# Altium PCB B45100557C.PCBDOC
Units mil, origin at the board's own origin, x right, y up, seen from the top; angles counter-clockwise.
Board outline 6000 x 4000 mil, 4 copper layers (Top Layer, L2, L3, Bottom Layer); 99 components, 46 nets, 282 pads, 307 vias.
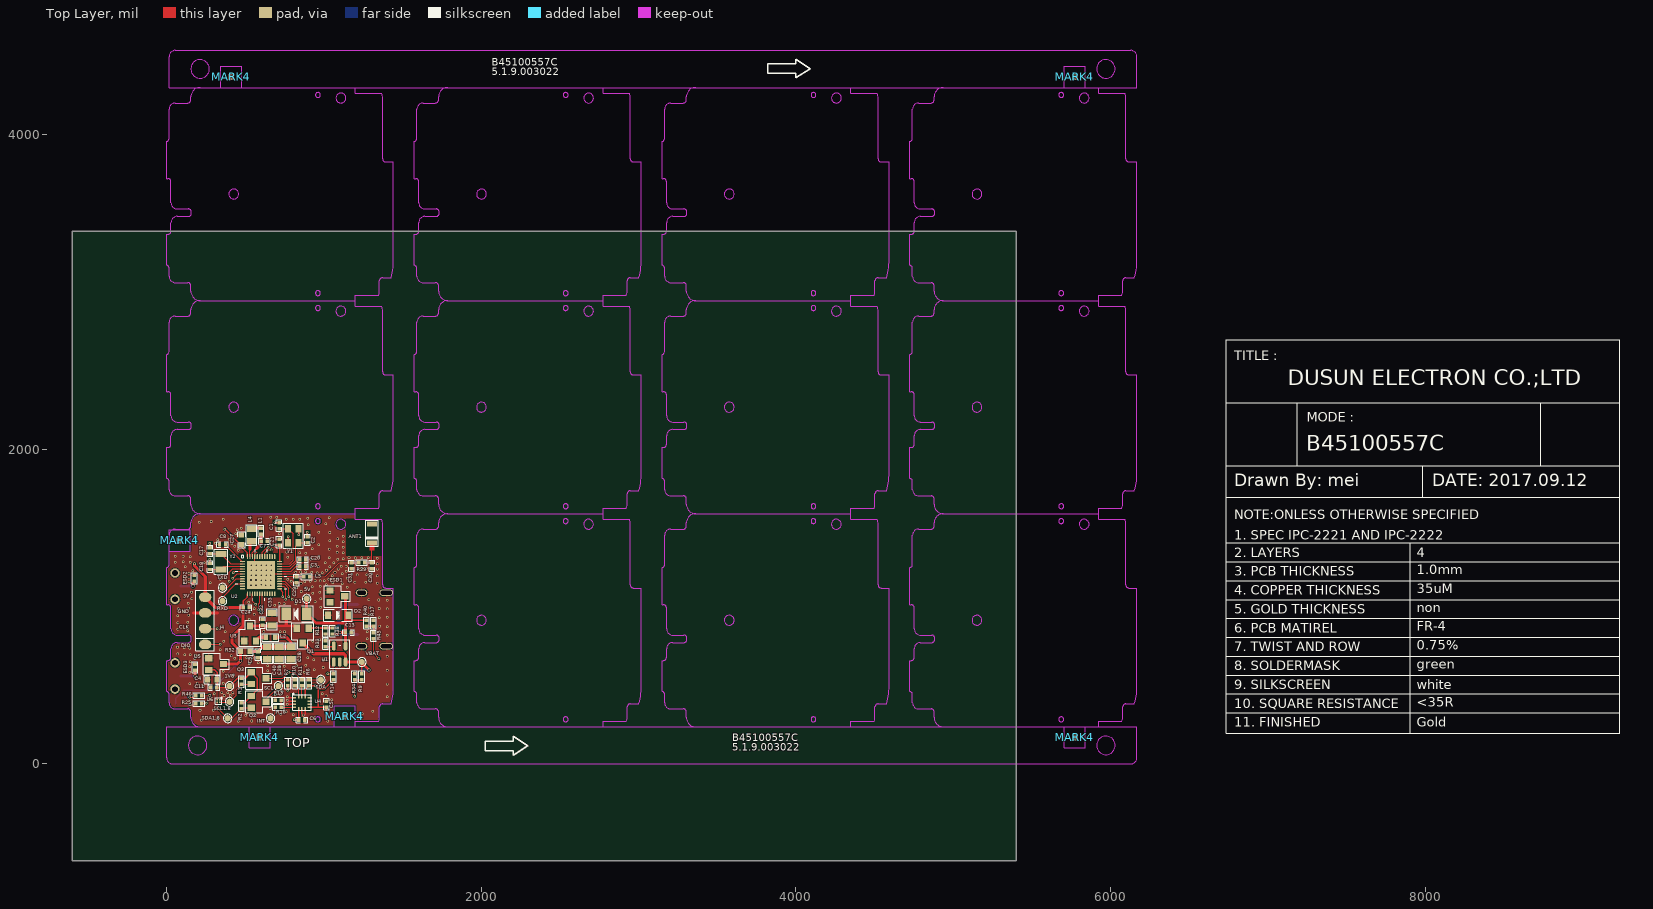
[diagram p0: Top Layer view]
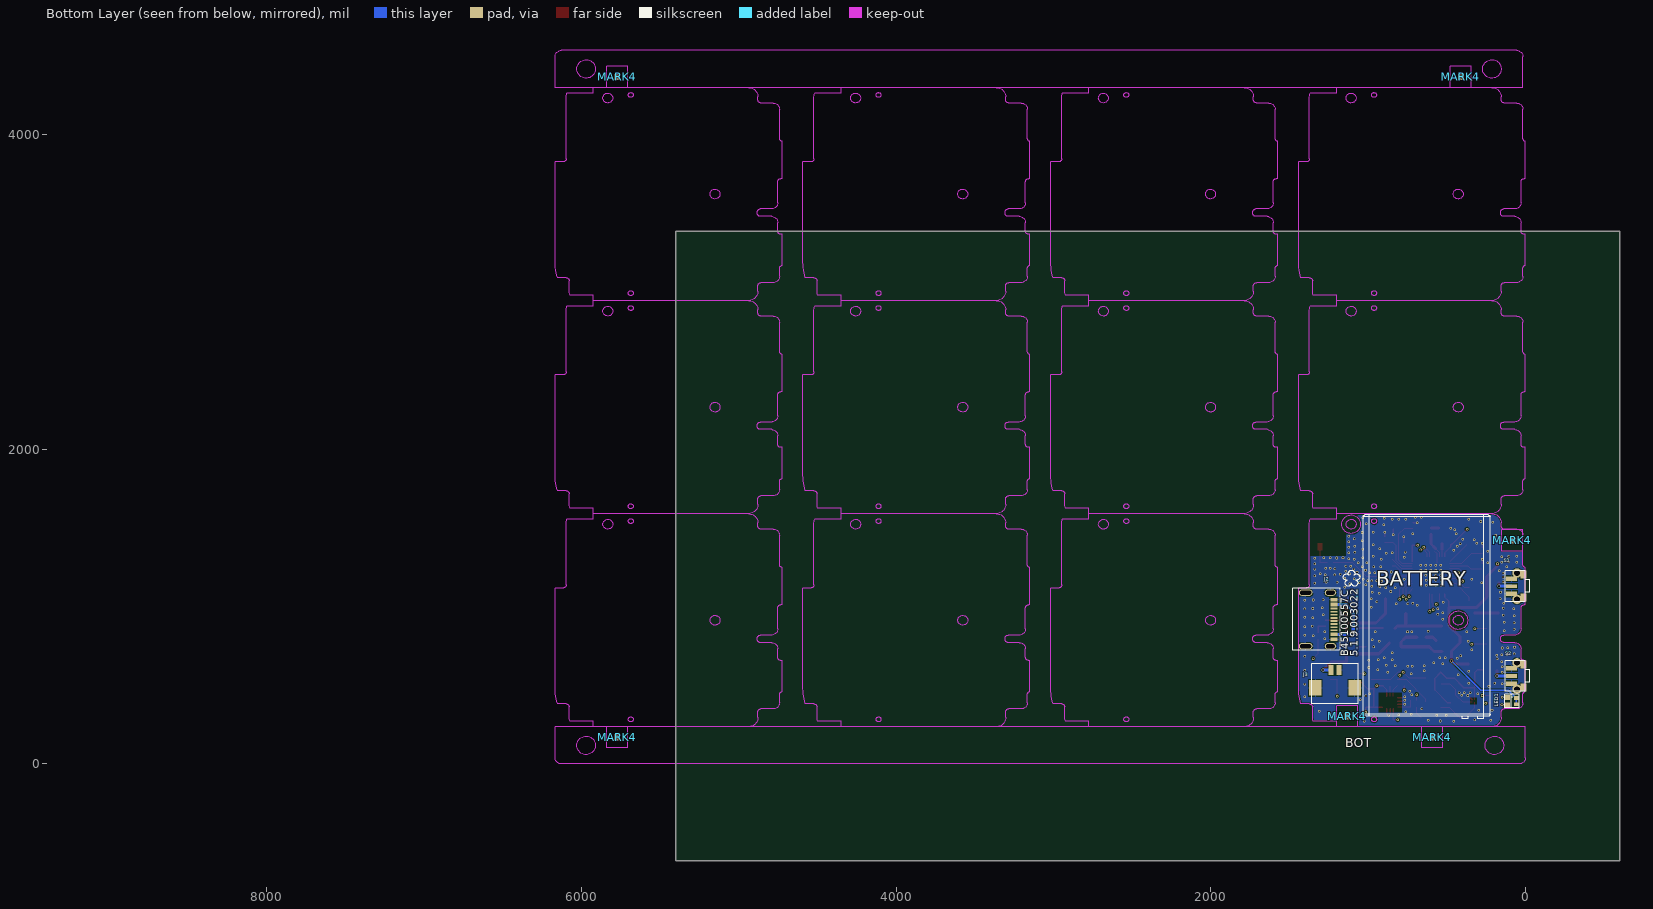
[diagram p1: Bottom Layer view, seen from below]
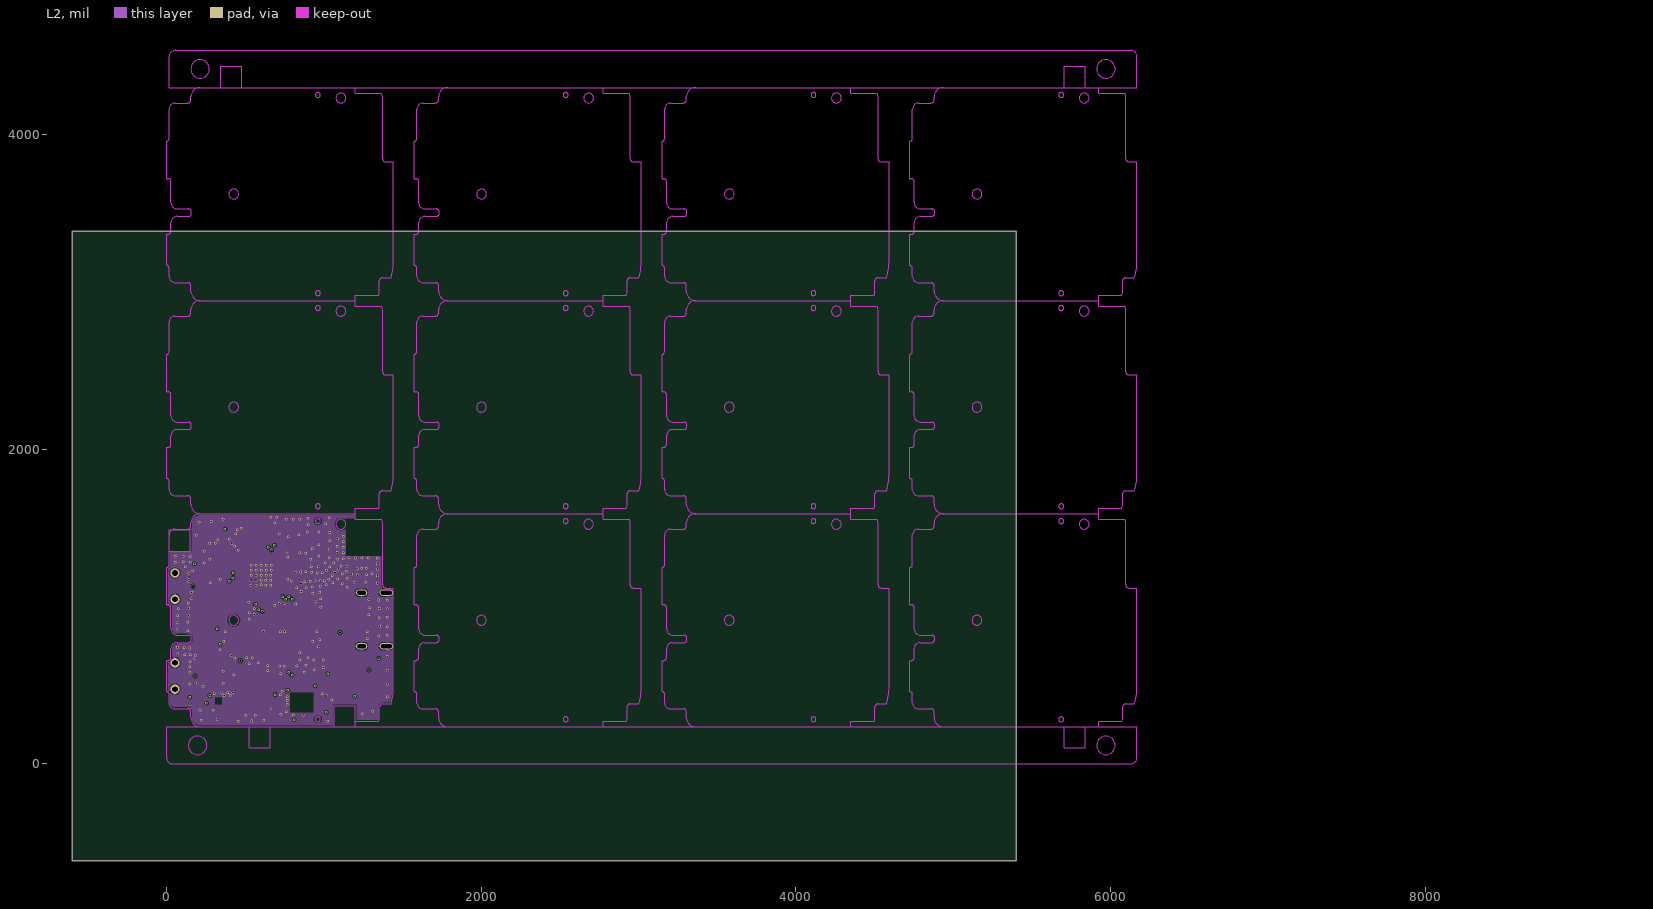
[diagram p2: L2]
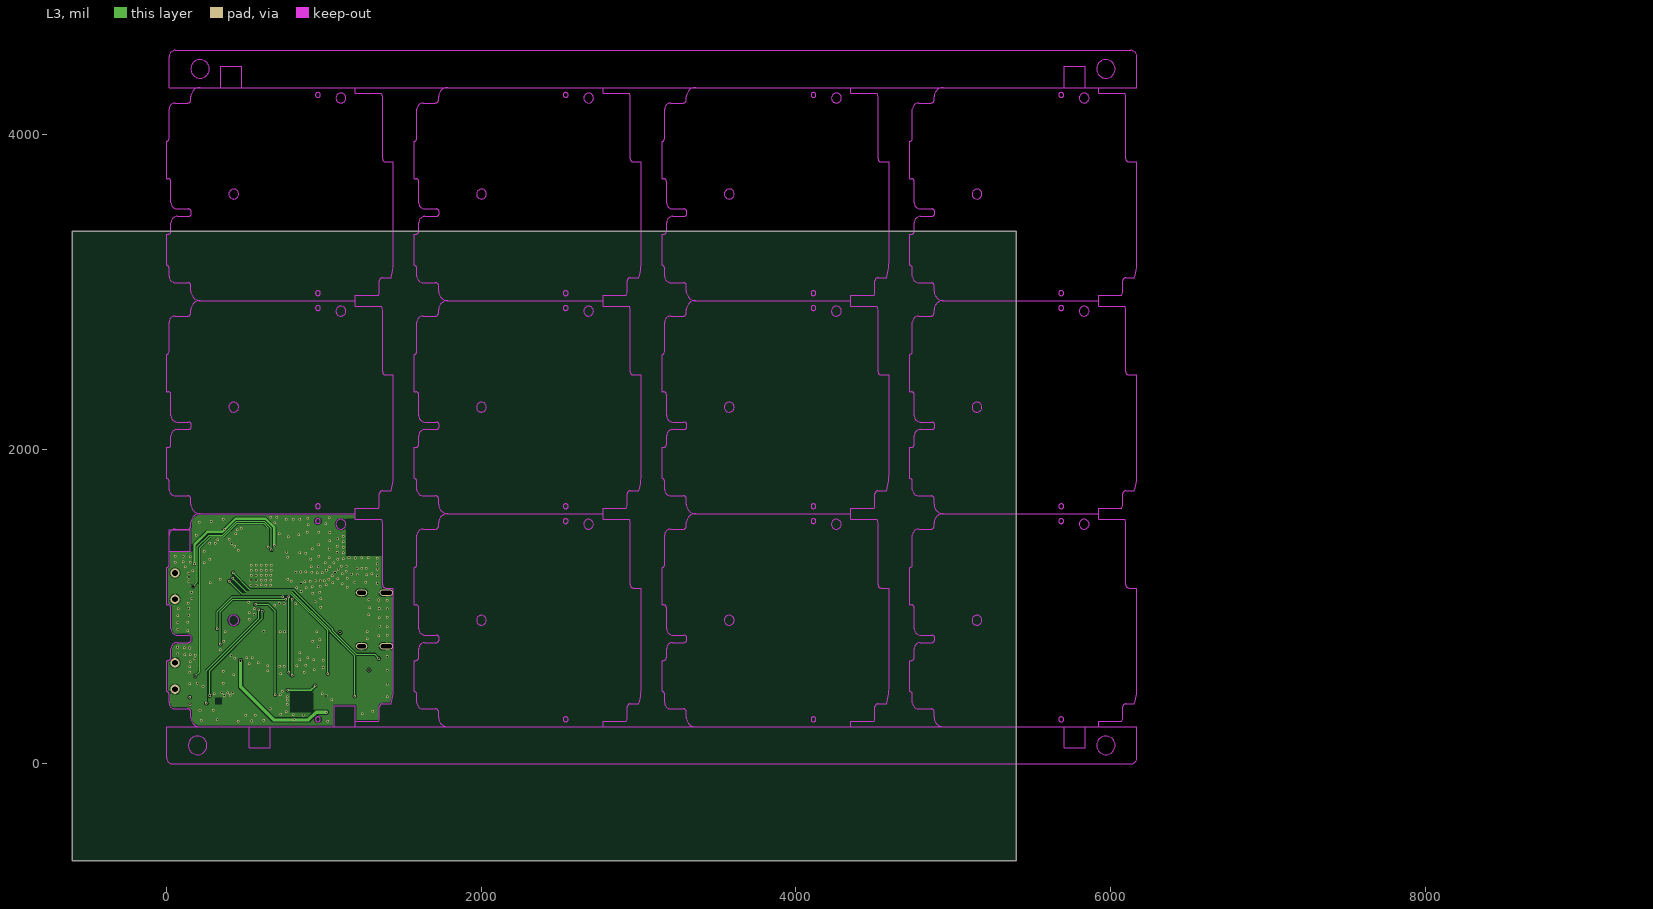
[diagram p3: L3]

## Layer stack, top to bottom
Top Layer: signal copper 1.4
Dielectric: core 12.6, FR-4, Dk 4.8
L2: signal copper 1.417
Dielectric: prepreg 12.6, FR-4, Dk 4.8
L3: signal copper 1.417
Dielectric: core 12.6, FR-4, Dk 4.8
Bottom Layer: signal copper 1.4

## Board outline
-599.3,-613.99 5400.7,-613.99 5400.7,3386.01 -599.3,3386.01

## Design rules (kind name [scope] priority, off if disabled: settings)
Clearance [All] p1: gap=6
ComponentClearance [All] p1: gap=0 collisioncheckmode=3 verticalgap=0
PolygonConnect PolygonConnect_1 [(InPadClass('All Pads'))] p1: connectstyle=Relief reliefconductorwidth=10 reliefentries=4 polygonreliefangle="90 Angle"
PolygonConnect [All] p2: connectstyle=Direct reliefconductorwidth=10 reliefentries=4 polygonreliefangle="90 Angle"
RoutingVias [All] p1: holewidth=28 width=50 viastyle="Through Hole" minholewidth=28 minwidth=50 maxholewidth=28 maxwidth=50
SolderMaskExpansion [All] p1: expansion=4
TestPointUsage [All] p1: valid=0 allowmultiple=FALSE
Testpoint [All] p1: side=15 testpointundercomponent=TRUE minsize=40 maxsize=100 preferedsize=60 minholesize=0 maxholesize=40 preferedholesize=32 testpointgrid=1 style=1023 order=0123456789
Width [All] p1: maxlimit=100 minlimit=5.91 preferedwidth=6 toplayer_prefwidth=5.98 bottomlayer_prefwidth=5.98 minimp=50.000000 maximp=50.000000 favimp=50.000000
18 further rules are at their usual default settings.

## Classes and differential pairs
component class B45100557C: 1V8 5V ANT1 ANT? C1 C2 C3 C4 C5 C6 C7 C8 C9 C11 C13 C17 C18 C20 C21 C24 C27 C28 C29 C30 C31 C32 C33 C39 C40 C? D1 D2 ESD1 ESD2 ESD3 INT J2 J3 J4 J? L1 L2 L4 L5 L? LED1 LED? Q1 Q2 Q3 Q? R1 R2 R6 R7 R9 R10 R11 R12 R13 R14 R16 R17 R25 R29 R33 R34 R38 R40 R45 R46 R52 R? RXD S1 S2 SCL SCL1.8 SDA SDA1.8 TXD U1 U2 U3 U4 U5 U6 U? VBAT VOL+ VOL- Y1 Y2 Y?

## Components (designator, comment, footprint, x,y, rotation, side; value= is the part's Value field where it differs from the comment)
1V8 "TAP" TS-1.0 400,495 r90 top
5V "TAP" TS-1.0 890,1050 r0 top
ANT1 "RFANT3216120A5T" RFANT3216120A1T 1305,1465 r90 top
C1 "20pF" C-0402 715,1515 r90 top
C2 "20pF" C-0402 895,1425 r90 top
C3 "NC" C-0402 865,1255 r0 top
C4 "10uF" C-0603 290,535 r180 top
C5 "0.1uF" C-0402 1015,380 r90 top
C6 "0.1uF" C-0402 860,280 r0 top
C7 "1uF" C-0402 620,1415 r180 top
C8 "0.1uF" C-0402 355,1395 r0 top
C9 "0.1uF" C-0402 580,695 r270 top
C11 "0.1uF" C-0402 300,485 r180 top
C13 "1uF/10V" C-0402 1155,835 r0 top
C17 "12pF" C-0402 275,1355 r90 top
C18 "12pF" C-0402 275,1255 r90 top
C20 "100pF" C-0402 865,1300 r0 top
C21 "0.1uF" C-0402 715,1410 r90 top
C24 "0.1uF" C-0402 505,995 r0 top
C27 "4.7uF" C-0603 475,1425 r90 top
C28 "22uF" C-0805 790,705 r270 top
C29 "0.8pF" C-0402 825,1170 r270 top
C30 "NC" C-0402 1305,1260 r270 top
C31 "NC" C-0402 1175,1260 r270 top
C32 "0.1uF" C-0402 610,900 r90 top
C33 "22uF" C-0805 670,920 r90 top
C39 "22uF" C-0805 715,705 r270 top
C40 "22uF" C-0805 640,705 r270 top
D1 "BAS85" SOD-80 825,955 r180 top
D2 "MMSZ5232B" sod-123 1090,945 r0 top
ESD1 "ESD dual" SOT-23 1085,1065 r0 top
ESD2 "PESD5V0X1BCAL" R-0402 175,1180 r270 top
ESD3 "PESD5V0X1BCAL" R-0402 180,615 r270 top
INT "TAP" TS-1.0 660,290 r270 top
J2 "USB type C" "USB TYPE C" 1216.81,918.31 r270 bottom locked
J3 "HEADER-2" 1.25T-2AWB 1210,540 r180 bottom
J4 "HEADER-4" PH-4-2.54-1 245,910 r90 top
L1 "15nH" R-0402 600,1480 r270 top
L2 "BLM18AG601SN1D" R-0603 660,805 r180 top
L4 "10uH" R-0805 540,1455 r90 top
L5 "3.9nH" R-0402 890,1190 r0 top
LED1 "LED*2-4" A-SP1942R6B1C-A01-2T 85,400 r180 bottom locked
MARK4 "MARK" MARK-3.0#1 5772.51,169.29 r90 top
MARK4 "MARK" MARK-3.0#1 590.55,169.29 r90 top
MARK4 "MARK" MARK-3.0#1 5772.52,4366.18 r270 top
MARK4 "MARK" MARK-3.0#1 409.45,4366.16 r270 top
MARK4 "MARK" MARK-3.0#1 1132.75,303.17 r90 top
MARK4 "MARK" MARK-3.0#1 82.53,1420.28 r90 top
MARK4 "MARK" MARK-3.0#2 590.55,169.29 r180 bottom
MARK4 "MARK" MARK-3.0#2 5772.51,169.29 r0 bottom
MARK4 "MARK" MARK-3.0#2 409.45,4366.16 r180 bottom
MARK4 "MARK" MARK-3.0#2 5772.52,4366.18 r0 bottom
MARK4 "MARK" MARK-3.0#2 1132.75,303.17 r0 bottom
MARK4 "MARK" MARK-3.0#2 82.53,1420.28 r0 bottom
Q1 "DMP2305U" SOT-23 865,815 r270 top
Q2 "SI2312" SOT-23 585,395 r0 top
Q3 "SI2312" SOT-23 585,545 r0 top
R1 "2.2k" R-0402 475,525 r270 top
R2 "2.2k" R-0402 475,370 r270 top
R6 "4.7k" R-0402 905,515 r90 top
R7 "4.7k" R-0402 770,515 r90 top
R9 "1M,1%,0402" R-0402 1240,555 r90 top
R10 "10R" R-0402 815,515 r90 top
R11 "10R" R-0402 860,515 r90 top
R12 "1M" R-0402 1010,845 r90 top
R13 "0R" R-0402 710,405 r0 top
R14 "10k" R-0402 1060,555 r90 top
R16 "10R" R-0402 710,360 r0 top
R17 "300k" R-0402 1315,895 r270 top
R25 "220R" R-0402 205,385 r180 top
R29 "NC" R-0402 1240,1280 r0 top
R33 "8.2K" R-0402 1010,765 r270 top
R34 "1M,1%,0402" R-0402 1195,555 r270 top
R38 "10K" R-0402 1055,845 r270 top
R40 "200k" R-0402 1270,895 r90 top
R45 "10R" R-0402 1315,815 r90 top
R46 "1k" R-0402 205,435 r180 top
R52 "0R" R-0603 500,715 r0 top
RXD "TAP" TS-1.0 355,1035 r90 top
S1 "SKRTLAE010" SKRTLAE010 88.58,1129.96 r90 bottom locked
S2 "SKRTLAE010" SKRTLAE010 88.58,559.06 r90 bottom locked
SCL "TAP" TS-1.0 710,495 r0 top
SCL1.8 "TAP" TS-1.0 400,395 r90 top
SDA "TAP" TS-1.0 980,535 r0 top
SDA1.8 "TAP" TS-1.0 388,290 r90 top
TXD "TAP" TS-1.0 355,1120 r270 top
U1 "CE3150AM" SOT-23-5 1100,720 r0 top
U2 "nRF52832" QFN-48-6*6-0.4 600,1200 r270 top locked
U3 "S-1206B30-M3T1G(S)" SOT-23 530,830 r90 top
U4 "LSM6DSL" LGA14 860,390 r0 top
U5 "S-1206B18-M3T1S" SOT-23 315,635 r0 top
U6 "AK09918C" AK09918C 330,400 r90 top
VBAT "TAP" TS-1.0 1240,647.83 r90 top
Y1 "32Mhz,12pF" XD3225-1-12M-125M 805,1450 r270 top
Y2 "32.768KHz,12.5pF" 32.768Khz-3215 345,1285 r270 top
? "Comment" 1-ARROW 3820,4420 r0 top
? "Comment" 1-ARROW 2025,115 r0 top
? "Comment" "PCB technical" 6735,2695 r0 top
? "Comment" 梅花 1105,1150 r180 bottom

## Footprints (in the part's own frame and the unit in brackets; to place one, negate y for a bottom-side part, rotate by r counter-clockwise, add the part's x,y. Pads: shape width x height; smd on the part's side, far side on the other; paste and mask are expansions set on the pad)
1-ARROW [mil]
  silkscreen extent 0,-60 270,60
1.25T-2AWB [mm]
  rect 2x2.5 smd: 0(-3.175,-1.45) 0(3.175,-1.45)
  rect 0.8x1.6 smd: 1(0.625,1.45) 2(-0.625,1.45)
  silkscreen extent -3.75,-4 3.75,2.5
32.768Khz-3215 [mm]
  rect 1x1.8 smd: 1(-1.25,0) 2(1.25,0)
  silkscreen extent -2,-1.1 2,1.1
A-SP1942R6B1C-A01-2T [mm]
  rect 0.8x0.8 smd: 1(-0.7,-0.6) 2(-0.7,0.6)
  rect 0.8x0.6 smd: 3(0.7,0.5) 4(0.7,-0.5)
  silkscreen extent -1.2,-1.1 1.2,1.1
AK09918C [mm]
  round 0.23 smd: A1(0.2,-0.2) A2(-0.2,-0.2) B1(0.2,0.2) B2(-0.2,0.2)
  silkscreen extent -0.5,-0.63 0.63,0.5
C-0402 [mil]
  rect 22x24 smd: 1(-19,0) 2(19,0)
  silkscreen extent -36,-18 36,18
C-0603 [mil]
  rect 30x35 smd: 1(-30,0) 2(30,0)
  silkscreen extent -51,-24 51,24
C-0805 [mil]
  rect 40x56 smd: 1(-40,0) 2(40,0)
  silkscreen extent -66,-34 66,34
LGA14 [mm]
  rect 0.675x0.25 smd: 1(-1.263,0.75) 2(-1.263,0.25) 3(-1.263,-0.25) 4(-1.263,-0.75) 8(1.263,-0.75) 9(1.263,-0.25) 10(1.263,0.25) 11(1.263,0.75)
  rect 0.25x0.675 smd: 5(-0.5,-1.013) 6(0,-1.013) 7(0.5,-1.013) 12(0.5,1.013) 13(0,1.013) 14(-0.5,1.013)
  silkscreen extent -1.5,-1.25 1.5,1.47
MARK-3.0#1 [mm]
  rect 1x1 smd: 1(0,0)
  rect 2.5x2.5 on Top Solder: 4(0,0)
  Keep-Out Layer lines w0.127: -1.7,1.7 1.7,1.7 1.7,-1.7 -1.7,-1.7 -1.7,1.7
MARK-3.0#2 [mm]
  rect 1x1 smd: 1(0,0)
  rect 2.5x2.5 on Bottom Solder: 4(0,0)
  Keep-Out Layer lines w0.127: 1.7,-1.7 1.7,1.7 -1.7,1.7 -1.7,-1.7 1.7,-1.7
"PCB technical" [mil]
  silkscreen extent 0,-2500 2500,0
PH-4-2.54-1 [mil]
  oval 60x78.74 smd: 1(-150,0) 2(-50,0) 3(50,0) 4(150,0)
  silkscreen extent -189,-59 194,59
QFN-48-6*6-0.4 [mm]
  rect 4.5x4.5 smd: 0(0,0)
  oval 0.2x0.8 smd: 1(-2.2,-3) 2(-1.8,-3) 3(-1.4,-3) 4(-1,-3) 5(-0.6,-3) 6(-0.2,-3) 7(0.2,-3) 8(0.6,-3) 9(1,-3) 10(1.4,-3) 11(1.8,-3) 12(2.2,-3) 25(2.2,3) 26(1.8,3) 27(1.4,3) 28(1,3) 29(0.6,3) 30(0.2,3) 31(-0.2,3) 32(-0.6,3) 33(-1,3) 34(-1.4,3) 35(-1.8,3) 36(-2.2,3)
  oval 0.8x0.2 smd: 13(3,-2.2) 14(3,-1.8) 15(3,-1.4) 16(3,-1) 17(3,-0.6) 18(3,-0.2) 19(3,0.2) 20(3,0.6) 21(3,1) 22(3,1.4) 23(3,1.8) 24(3,2.2) 37(-3,2.2) 38(-3,1.8) 39(-3,1.4) 40(-3,1) 41(-3,0.6) 42(-3,0.2) 43(-3,-0.2) 44(-3,-0.6) 45(-3,-1) 46(-3,-1.4) 47(-3,-1.8) 48(-3,-2.2)
  silkscreen extent -4.19,-4.19 4.19,4.19
R-0402 [mil]
  rect 22x24 smd: 1(-19,0) 2(19,0)
  silkscreen extent -36,-18 36,18
R-0603 [mil]
  rect 30x35 smd: 1(-30,0) 2(30,0)
  silkscreen extent -51,-24 51,24
R-0805 [mil]
  rect 40x56 smd: 1(-40,0) 2(40,0)
  silkscreen extent -66,-34 66,34
RFANT3216120A1T [mm]
  rect 0.8x1.66 smd: 1(-1.55,0) 2(1.55,0)
  Top Layer region: -2.78,-0.4 -1.55,-0.4 -1.55,0.406 -2.78,0.406
  Top Layer pour cut-out: -3.66,-1.74 -3.66,4.26 2.34,4.26 2.34,-1.74
  Bottom Layer pour cut-out: -3.66,-1.74 -3.66,4.26 2.34,4.26 2.34,-1.74
  silkscreen extent -2.1,-1 2.1,1
SKRTLAE010 [mm]
  rect 1.3x0.9 smd: 0(-1.85,-1.95) 0(1.85,-1.95)
  rect 0.75x1.8 smd: 1(-1.225,0) 1(1.225,0)
  rect 0.6x1.8 smd: 2(0,0)
  silkscreen extent -2.5,-2.95 2.5,1
SOD-80 [mil]
  rect 60x78.74 smd: 1(-65,0) 2(65,0)
  silkscreen extent -108,-50 108,50
sod-123 [mm]
  rect 0.91x1.22 smd: 1(-1.635,0) 2(1.635,0)
  silkscreen extent -2.3,-1 2.3,1
SOT-23 [mil]
  rect 45x40 smd: 1(-47.24,37.4) 2(-47.24,-37.4) 3(47.24,0)
  silkscreen extent -83,-69 83,69
SOT-23-5 [mm]
  oval 0.6x1.5 smd: 1(-0.95,-1.833) 2(0,-1.833) 3(0.95,-1.833) 4(0.95,0.767) 5(-0.95,0.767)
  silkscreen extent -1.6,-2.83 1.6,1.77
TS-1.0 [mm]
  round 1 smd: 1(0,0)
  silkscreen extent -0.7,-0.7 0.7,0.7
"USB TYPE C" [mm]
  oval 1x2.2 hole 0.6 slot 1.8 at 90 deg: 0(-4.32,-4.565) 0(4.32,-4.565)
  oval 1x1.8 hole 0.6 slot 1.4 at 90 deg: 0(-4.32,-0.565) 0(4.32,-0.565)
  rect 0.6x1.15 smd: A1/B12(-3.2,0) A4/B9(-2.4,0) B1/A12(3.2,0) B4/A9(2.4,0)
  rect 0.3x1.15 smd: A5(-1.25,0) A6(-0.25,0) A7(0.25,0) A8(1.25,0) B5(1.75,0) B6(0.75,0) B7(-0.75,0) B8(-1.75,0)
  silkscreen extent -5,-6.67 5,1
XD3225-1-12M-125M [mm]
  rect 1.2x1 smd: 1(-1.15,-0.85) 2(1.15,0.85) 3(-1.15,0.85) 3(1.15,-0.85)
  silkscreen extent -2.04,-1.6 2.02,1.6
梅花 [mil]
  silkscreen extent -52,-20 52,82

## Part data
ANT1: library part ANTENNA
C1 C2 C3 C4 C7 C8 C20 C21 C24 C27 C29 C30 C31 C32 C33 C39 C40: library part CAP
C5 C6 C11: library part Cap, "capacitor 27 pF NPO , +/- 2 %, SMD case 0603"
C9 C13: library part "CAP E"
C17 C18: library part CAP, "Capacitor"
C28: library part "CAPACITOR POL"
D1: library part DIODE
D2: library part ZENER
ESD2 ESD3: library part ESD
J2: library part HEADER-6
J3: library part HEADER-16
L1 L2: library part Inductance
L4 L5: library part INDUCTOR
LED1: library part LED
Q1: library part NPN, "NPN型晶体管"
Q2 Q3: library part "MOSFET N"
R1 R2 R6 R7 R9 R10 R11 R12 R13 R14 R16 R17 R25 R29 R33 R34 R38 R40 R45 R46 R52: library part RES
S1 S2: library part SW-PB
U2: library part "BCM20735 60PIN QFN"
U3 U5: library part S-1206BXX
U4: library part BMI160
Y1: library part CRYSTAL4
Y2: library part CRYSTAL2

## Free pads (board coordinates)
  round 59.06 hole 35.43: 3(53.15,475.39) 3(53.15,642.72) 3(53.15,1046.3) 3(53.15,1213.62)

## Via types
v1: diameter 16, hole 10, Top Layer to Bottom Layer, tented both sides, 302 vias
v2: diameter 20, hole 14, Top Layer to Bottom Layer, tented both sides, 5 vias

## Nets (pads, with @x,y where several pads share a name; then routed paths per layer and width w, separated by ;. In a path a pad name is that pad's centre, name@x,y a point inside that pad or via, vN(x,y) a via of type N, cw(c..) or ccw(c..) an arc to the next point about the centre after c; other vN are vias at no path point)
1V8: 1V8.1 C4.1 C11.1 Q2.1 Q3.1 R1.1 R2.1 U5.2 U6.B1 | length 751.9
  Top Layer w6: U6.B1 C11.1@322.13,481.87
  Top Layer w10: U5.2 305.4,597.6 322.13,580.87 C11.1@322.13,485 ; C11.1 392,485 451,544 499.35,544 Q3.1 575,545.16 575,469.65 494.35,389 R2.1
3V: C5.1 C6.1 C21.1 C24.1 C27.1 J4.4 LED1.3 LED1.4 R6.1 R7.1 R14.1 R52.1 U2.13 U2.36 U2.48 U4.5 U4.8 U4.12 U5.3 | length 4515.1
  Top Layer w10: v1(370.6,1491.9) 467.5,1395 C27.1 475,1379 513.39,1340.61 U2.48 ; C24.1 486,1034 513.39,1061.39 U2.13 ; v1(685,1391) C21.1 ; U2.36 C21.1@718.11,1391 ; v1(770,468) R7.1 ; v1(811,280) 840.31,280 U4.5 ; U4.12 879.69,470.68 R6.1 v1(944,496) 963,477 ; U4.8 C5.1@1014.47,360.47 ; 963,360.47 963,477 ; v1(1015,329) C5.1 ; R14.1 1001,477 963,477
  Top Layer w20: v1(177,1273) 177,1259 245,1191 J4.4 310,995 C24.1 486,879 415,808 415,770 R52.1 v2(470,656) 449,635 U5.3
  L3 w10: v1(770,468) 916,468 v1(944,496)
  L3 w15: v1(177,1273) 177,1394 258,1475 353.69,1475 437.69,1559 628,1559 685,1502 v1(685,1391)
  L3 w20: v2(470,656) 470,491 681,280 901,280 950,329 v1(1015,329)
  Bottom Layer w10: LED1.4 57.44,417.44 109,469 283,469 v2(470,656)
BLUE: R25.1 U2.18 | length 866.4
  Top Layer w6: R25.1 v1(253,385) ; v1(586,980) 586,1017 592.13,1023.13 U2.18
  L3 w6: v1(253,385) 253,592 586,925 v1(586,980)
CHG: R14.2 U1.1 U2.4 | length 1286.6
  Top Layer w6: v1(398,1161) 398,1217 420.37,1239.37 U2.4 ; v1(1023,574) R14.2 U1.1@1060,645.24
  L3 w6: v1(398,1161) 476,1083.01 789,1083.01 1023,849 v1(1023,574)
GND: C1.2 C2.2 C3.2 C4.2 C5.2 C6.2 C7.1 C8.1 C9.2 C11.2 C13.2 C17.2 C18.2 C20.2 C21.2 C24.2 C27.2 C28.2 C29.2 C30.2 C31.2 C32.2 C33.2 C39.2 C40.2 D2.1 ESD1.1 ESD2.1 ESD3.1 J2.0 J2.A1/B12 J2.B1/A12 J3.0 J3.1 J4.3 pad.3 R12.1 R17.1 R33.1 R34.1 S1.0 S1.1 S2.0 S2.1 U1.2 U2.0 U2.31 U2.45 U3.1 U4.1 U4.2 U4.3 U4.6 U4.7 U5.1 U6.A1 Y1.3 | length 708.6
  Top Layer w6: U2.0@560.63,1275.63 560.63,1334.63 576,1350 ; U2.0@674.87,1207.87 758,1207.87
  Top Layer w10: C18.2 v1(275,1301) ; C17.2 v1(275,1402) ; U6.A1 v1(365,435) ; v1(688,1534) C1.2 ; Y1.3@771.54,1404.72 v1(771.54,1444.54) ; 776.16,380.16 U4.3 ; 776.53,419.53 U4.1 ; 776.84,399.84 U4.2 ; v1(838.46,1455.54) Y1.3@838.46,1495.28 ; 860,320 U4.6 ; 879.69,316.69 U4.7 ; C2.2 v1(895,1472)
  Top Layer w20: 172,960 324,960
  other v1: 1025,271 456,272 542,273 616,277 219,278 323,281 502,310 562,310 868,311 806,312 724,316 1242,320 761,331 1311,335 295,341 212,342 657,350 766,380 766,404 1049,408 766,428 1401,428 1013,432 405,437 723,440 989,446 302,447 389,453 350,454 419,454 736,461 231,494 1401,508 146,511 196,513 361,513 426,568 725,574 875,582 148,584 361,589 643,592 1402,594 938,600 995,613 147,617 748,621 718,622 642,623 827,625 883,626 526,638 581,642 151,649 996,658 936,661 846,663 180,668 433,671 508,674 545,674 896,676 1402,683 412,687 182,692 149,693 114,695 70,699 845,708 340,725 148,737 113,739 69,741 965,746 364,781 929,781 972,790 1275,796 1349,815 1403,817 954,839 1275,839 372,841 721,841 749,841 616,842 134,847 72,855 1403,873 1353,875 72,897 135,901 524,921 1350,930 1401,932 70,942 139,944 1285,947 556,950 524,960 1401,985 73,987 556,987 1352,988 139,989 1290,992 980,995 686,1010 746,1018 820,1019 715,1020 138,1021 522,1027 943,1032 1401,1041 1348,1042 1286,1043 979,1049 161,1051 928,1086 158,1090 974,1091 856,1096 826,1119 887,1121 1149,1123 926,1127 975,1130 631,1136 663,1136 536,1137 568,1137 600,1138 1015,1139 1116,1146 854,1147 1340,1149 1055,1151 278,1153 1197,1154 1266,1155 142,1158 877,1159 914,1160 792,1162 975,1163 943,1164 1003,1164 600,1168 631,1168 663,1168 536,1169 568,1169 770,1173 341,1174 1031,1175 1087,1177 1148,1179 142,1188 1340,1196 1052,1197 538,1200 568,1200 600,1200 632,1200 662,1200 1212,1201 1271,1203 1175,1207 1115,1208 1304,1209 142,1213 989,1214 957,1215 821,1217 1070,1217 923,1219 852,1220 884,1221 1141,1225 165,1229 1016,1230 632,1231 664,1231 537,1232 569,1232 600,1232 1090,1239 1338,1239 1210,1242 1269,1244 1239,1245 118,1253 919,1253 965,1253 1038,1254 1140,1256 1109,1257 600,1262 632,1263 664,1263 537,1264 569,1264 1340,1273 1062,1278 1007,1279 239,1280 56,1283 149,1283 105,1284 1087,1300 916,1301 1122,1305 1338,1307 1199,1309 1159,1310 1280,1310 1034,1311 1241,1311 769,1313 150,1317 55,1319 967,1320 104,1321 885,1339 846,1341 1123,1342 1085,1344 762,1347 240,1351 454,1357 1035,1365 926,1367 1122,1378 433,1383 1085,1384 966,1394 413,1401 309,1403 1122,1413 1037,1418 326,1424 397,1429 1086,1430 1123,1446 187,1454 716,1462 439,1463 1036,1471 966,1472 450,1489 475,1499 899,1521 1012,1527 207,1536 283,1541 361,1555 760,1555 806,1556 847,1556 898,1561 1033,1566 661,1568 699,1568
I2C_SCL: Q3.3 R6.2 R11.2 SDA.1 U2.27 | length 988.2
  Top Layer w6: Q3.3 739,545 v1(777,583) 811,583 R11.2 SDA.1@980,534 ; U2.27 749.12,1144.88 777,1117 v1(777,1063)
  L3 w6: v1(777,583) v1(777,1063)
I2C_SDA: Q2.3 R7.2 R10.2 SCL.1 U2.28 | length 929.2
  Top Layer w6: Q2.3 632.24,412.24 754,534 R10.2 ; U2.28 751.37,1160.63 797,1115 v1(797,1047) ; 797,534 v1(797,563)
  L3 w6: v1(797,563) v1(797,1047)
"IMU INT": R13.1 U2.15 | length 784.9
  Top Layer w6: U2.15 544.88,1034.12 v1(565,1014) ; R13.1 v1(691,441)
  L3 w6: v1(565,1014) 646,1014 691,969 v1(691,441)
INSERT: R45.1 U2.5 | length 1360.1
  Top Layer w6: v1(423,1214) 432.62,1223.62 U2.5 ; R45.1 1315,704 v1(1349,670)
  L3 w6: v1(423,1214) 529,1108 804,1108 1055,857 1055,847 1205,697 1322,697 v1(1349,670)
NetANT1_1: ANT1.1 C30.1 R29.2 | length 170
  Top Layer w6: R29.2 C30.1@1304,1280 ; C30.1 ANT1.1
NetC3_1: C3.1 U2.32 | length 140.9
  Top Layer w6: U2.32 792.62,1223.62 824,1255 C3.1
NetC7_2: C7.2 L1.2 U2.46 | length 165.7
  Top Layer w6: U2.46 544.88,1342.88 572,1370
  Top Layer w20: 572,1370 600,1398 L1.2
NetC8_2: C8.2 U2.1 | length 152.6
  Top Layer w6: C8.2@374,1394.5 U2.1
NetC9_1: C9.1 C28.1 C39.1 C40.1 L2.1 R52.2 | length 414.9
  Top Layer w20: R52.2 581,715 611,745 C28.1 790,775 760,805 L2.1
NetC20_1: C20.1 U2.33 | length 153
  Top Layer w6: U2.33 785.37,1239.37 C20.1
NetC29_1: C29.1 L5.1 U2.30 | length 152.9
  Top Layer w6: U2.30 L5.1@871,1192.13
NetC31_1: C31.1 L5.2 R29.1 | length 349.3
  Top Layer w6: L5.2 1007,1190 1097,1280 R29.1
NetC32_1: C32.1 C33.1 D1.2 Q1.2 U3.3 | length 381.6
  Top Layer w20: U3.3 812.6,877.24 Q1.2 ; 760,877.24 D1.2
NetINT_1: INT.1 R16.1 | length 82.8
  Top Layer w6: INT.1 691,321 R16.1
NetL1_1: L1.1 L4.2 | length 51
  Top Layer w20: L4.2@549,1499 L1.1
NetL2_2: L2.2 U3.2 | length 71.8
  Top Layer w20: U3.2 589.65,805 L2.2
NetL4_1: L4.1 U2.47 | length 81
  Top Layer w6: U2.47 529.13,1362.13
  Top Layer w20: 529.13,1362.13 L4.1@529.13,1399.13
NetLED1_1: LED1.1 R25.2 | length 77
  Top Layer w6: v1(148.38,376.38) 177.38,376.38 R25.2
  Bottom Layer w6: LED1.1 v1(148.38,376.38)
NetLED1_2: LED1.2 R46.2 | length 78.2
  Top Layer w6: v1(146.38,423.62) 174.62,423.62 R46.2
  Bottom Layer w6: LED1.2 v1(146.38,423.62)
NetQ1_1: Q1.1 R12.2 R38.1 | length 150.8
  Top Layer w10: Q1.1@904.16,864 R38.1
NetR10_1: R10.1 U4.14 | length 76.6
  Top Layer w6: R10.1 840.31,470.68 U4.14
NetR11_1: R11.1 U4.13 | length 66.1
  Top Layer w6: U4.13 R11.1
NetR13_2: R13.2 R16.2 U4.4 | length 125.8
  Top Layer w6: R16.2 R13.2 ; R16.2@729.47,360.47 U4.4
NetR17_2: R17.2 R40.1 R45.2 | length 87
  Top Layer w10: R40.1 R17.2 R45.2
NetR33_2: R33.2 U1.5 | length 48.4
  Top Layer w10: R33.2 U1.5@1058.4,746
NetRXD_1: RXD.1 U2.10 | length 187.6
  Top Layer w6: RXD.1 355,1061 438.88,1144.88 U2.10
NetTXD_1: TXD.1 U2.8 | length 150.2
  Top Layer w6: TXD.1 386,1120 442.38,1176.38 U2.8
RED: R46.1 U2.19 | length 834.6
  Top Layer w6: R46.1 v1(273,435) ; v1(607.87,969) U2.19
  L3 w6: v1(273,435) 273,591 607.87,925.87 v1(607.87,969)
S1: ESD2.2 S1.2 U2.41 | length 1129.7
  Top Layer w6: U2.41 623.62,1339.62 644,1360 v1(666,1360)
  Top Layer w20: v2(167.96,1129.96) ESD2.2@167.96,1153.96
  L3 w6: v2(167.96,1129.96) 196,1158 196,1379.31 271.72,1455.02 358.02,1455.02 445.02,1542.02 620.98,1542.02 666,1497 v1(666,1360)
  Bottom Layer w20: S1.2 v2(167.96,1129.96)
S2: ESD3.2 S2.2 U2.42 | length 1671.4
  Top Layer w6: U2.42 607.87,1345.87 639,1377 v1(647,1377)
  Top Layer w20: v2(180.94,559.06) ESD3.2@180.94,595.06
  L3 w6: v2(180.94,559.06) 209,587.11 209,1373 279,1443 363,1443 450,1530 615.71,1530 647,1498.7 v1(647,1377)
  Bottom Layer w20: S2.2@88.58,559.06 v2@180.94,559.06
SCL: Q3.2 R1.2 SCL1.8.1 U6.A2 | length 268.2
  Top Layer w6: U6.A2 396.13,392.13 442,438 442,473 476.6,507.6 Q3.2
SDA: Q2.2 R2.2 SDA1.8.1 U6.B2 | length 307.2
  Top Layer w6: U6.B2 322.13,355.87 SDA1.8.1 414,290 481.6,357.6 Q2.2
SWDCLK: J4.2 U2.25 | length 699.2
  Top Layer w6: J4.2 v1(321,860) ; U2.25 739,1092.5 v1(739,1064)
  L3 w6: v1(321,860) 321,967 418,1064 v1(739,1064)
SWDIO: J4.1 U2.26 | length 866.6
  Top Layer w6: J4.1 v1(341,760) ; U2.26 744.87,1129.13 757,1117 v1(757,1047)
  L3 w6: v1(341,760) 341,968 420,1047 v1(757,1047)
VBAT: J3.2 Q1.3 R9.2 U1.3 VBAT.1 | length 641
  Top Layer w10: R9.2 VBAT.1
  Top Layer w20: Q1.3 932.76,700 1126,700 1137.4,688.6 U1.3 1235.34,647.83 v2(1286.09,597.09)
  Bottom Layer w20: J3.2 v2(1286.09,597.09)
VBUS: 5V.1 C13.1 D1.1 D2.2 ESD1.3 J2.A4/B9 J2.B4/A9 R38.2 R40.2 U1.4 | length 1295.3
  Top Layer w10: R38.2 1093,826 v2(1102,835) ; 1136,914 R40.2
  Top Layer w20: 5V.1 D1.1 949,896 1136,896 ; v2(1102,835) C13.1 ; U1.4@1136,751.6 ESD1.3@1136,1065
  Bottom Layer w20: J2.B4/A9 1113.18,823.82 1094,843 1094,969 1137.8,1012.8 J2.A4/B9
VOLTAGE: R9.1 R34.2 U2.6 | length 1460.7
  Top Layer w6: v1(421,1181) 447.87,1207.87 U2.6 ; v1(1195,431) R34.2 R9.1
  L3 w6: v1(421,1181) 506.38,1095.62 793.38,1095.62 1040,849 1040,842 1195,687 v1(1195,431)
XC1: C1.1 U2.35 Y1.1 | length 368.4
  Top Layer w6: C1.1 770.81,1496 805,1461.81 805,1294 781.87,1270.87 U2.35
XC2: C2.1 U2.34 Y1.2 | length 294.6
  Top Layer w6: U2.34 783.12,1255.12 821,1293 821,1387.26 839.74,1406 C2.1
XL1: C17.1 U2.2 Y2.1 | length 233.9
  Top Layer w6: C17.1 343.21,1336 408.35,1270.87 U2.2
XL2: C18.1 U2.3 Y2.2 | length 214.8
  Top Layer w6: C18.1 345.21,1236 364.33,1255.12 U2.3
pads on no net: ANT1.2 ESD1.2 J2.A5 J2.A6 J2.A7 J2.A8 J2.B5 J2.B6 J2.B7 J2.B8 MARK4.1 MARK4.4 U2.7 U2.9 U2.11 U2.12 U2.14 U2.16 U2.17 U2.20 U2.21 U2.22 U2.23 U2.24 U2.29 U2.37 U2.38 U2.39 U2.40 U2.43 U2.44 U4.9 U4.10 U4.11

## Polygon pours and split planes (outlines as drawn)
GND on Top Layer "Top Layer-GND" (solid, remove dead copper, pour order 1000): -108,1668 -108,179 1554,179 1554,1668
GND on L2 "Top Layer-GND" (solid, remove dead copper, pour order 1000): -108,1668 -108,179 1554,179 1554,1668
GND on L3 "Top Layer-GND" (solid, remove dead copper, pour order 1000): -108,1668 -108,179 1554,179 1554,1668
GND on Bottom Layer "Top Layer-GND" (solid, remove dead copper, pour order 1000): -108,1668 -108,179 1554,179 1554,1668

## Keep-outs
Bottom Layer:
  circle w5: c426.06,913.43 r59.06
  circle w5: c1107.16,1523.66 r59.06
Keep-Out Layer:
  circle w5: c196.85,118.13 r59.06
  circle w5: c5969.36,118.11 r59.06
  circle w5: c212.6,4417.35 r59.06
  circle w5: c5969.37,4417.36 r59.06
  circle w5: c961.49,283.48 r15.75
  circle w5: c961.49,1543.33 r15.75
  circle w5: c426.05,913.41 r31.5
  circle w5: c1107.16,1523.64 r31.5
  circle w5: c2536.29,283.46 r15.75
  circle w5: c2536.29,1543.31 r15.75
  circle w5: c2000.86,913.39 r31.5
  circle w5: c2681.96,1523.62 r31.5
  circle w5: c4111.09,283.46 r15.75
  circle w5: c4111.09,1543.31 r15.75
  circle w5: c3575.66,913.39 r31.5
  circle w5: c4256.76,1523.62 r31.5
  circle w5: c5685.9,283.46 r15.75
  circle w5: c5685.9,1543.31 r15.75
  circle w5: c5150.46,913.39 r31.5
  circle w5: c5831.57,1523.62 r31.5
  circle w5: c961.49,1637.82 r15.75
  circle w5: c961.49,2897.66 r15.75
  circle w5: c426.05,2267.74 r31.5
  circle w5: c1107.16,2877.97 r31.5
  circle w5: c2536.29,1637.8 r15.75
  circle w5: c2536.29,2897.64 r15.75
  circle w5: c2000.86,2267.72 r31.5
  circle w5: c2681.96,2877.95 r31.5
  circle w5: c4111.09,1637.8 r15.75
  circle w5: c4111.09,2897.64 r15.75
  circle w5: c3575.66,2267.72 r31.5
  circle w5: c4256.76,2877.95 r31.5
  circle w5: c5685.9,1637.8 r15.75
  circle w5: c5685.9,2897.64 r15.75
  circle w5: c5150.46,2267.72 r31.5
  circle w5: c5831.57,2877.95 r31.5
  circle w5: c961.49,2992.15 r15.75
  circle w5: c961.49,4251.99 r15.75
  circle w5: c426.05,3622.07 r31.5
  circle w5: c1107.16,4232.3 r31.5
  circle w5: c2536.29,2992.13 r15.75
  circle w5: c2536.29,4251.97 r15.75
  circle w5: c2000.86,3622.05 r31.5
  circle w5: c2681.96,4232.29 r31.5
  circle w5: c4111.09,2992.13 r15.75
  circle w5: c4111.09,4251.97 r15.75
  circle w5: c3575.66,3622.05 r31.5
  circle w5: c4256.76,4232.29 r31.5
  circle w5: c5685.9,2992.13 r15.75
  circle w5: c5685.9,4251.97 r15.75
  circle w5: c5150.46,3622.05 r31.5
  circle w5: c5831.57,4232.29 r31.5
  lines w5: 0,236.22 6166.22,236.22 6166.21,39.35 cw(c6126.84,39.35) 6126.84,-0.02 916.77,0 39.37,0 cw(c39.37,39.37) 0,39.37 0,236.24 ; 3149.61,460.63 3149.61,657.48 3157.48,657.48 ccw(c3157.48,677.17) 3177.17,677.17 3177.17,732.28 cw(c3216.54,732.28) 3216.54,771.65 3287.4,771.65 ccw(c3287.4,791.34) 3307.09,791.34 3307.09,799.21 ccw(c3287.4,799.21) 3287.4,818.9 3216.54,818.9 cw(c3216.54,858.27) 3177.17,858.27 3177.17,992.13 ccw(c3157.48,992.13) 3157.48,1011.81 3149.61,1011.81 3149.61,1248.03 ccw(c3145.67,1267.32) 3165.35,1267.32 3165.35,1452.76 cw(c3204.72,1452.76) 3204.72,1492.13 3283.46,1492.13 ccw(c3283.46,1511.81) 3303.15,1511.81 3303.15,1531.5 cw(c3362.2,1531.5) 3362.2,1590.55 ; 3149.61,460.63 cw(c3145.67,441.34) 3165.35,441.34 3165.35,389.76 ccw(c3204.72,389.76) 3204.72,350.39 3283.46,350.39 cw(c3283.46,330.71) 3303.15,330.71 3303.15,295.28 ccw(c3362.2,295.28) 3362.2,236.22 4349.28,236.22 4349.28,271.65 4497.05,271.65 ccw(c4442.92,295.28) 4501.98,295.28 4501.98,362.2 cw(c4521.66,362.2) 4521.66,381.89 4575.63,381.89 ccw(c4276.45,480.32) 4591.41,480.32 4591.41,1118.11 4541.35,1118.11 cw(c4541.35,1137.8) 4521.66,1137.8 4521.66,1531.5 ccw(c4462.61,1531.5) 4516.73,1555.12 4349.28,1555.12 4349.28,1590.55 ; 4724.41,460.63 4724.41,657.48 4732.28,657.48 ccw(c4732.28,677.17) 4751.97,677.17 4751.97,732.28 cw(c4791.34,732.28) 4791.34,771.65 4862.2,771.65 ccw(c4862.2,791.34) 4881.89,791.34 4881.89,799.21 ccw(c4862.2,799.21) 4862.2,818.9 4791.34,818.9 cw(c4791.34,858.27) 4751.97,858.27 4751.97,992.13 ccw(c4732.28,992.13) 4732.28,1011.81 4724.41,1011.81 4724.41,1248.03 ccw(c4720.47,1267.32) 4740.16,1267.32 4740.16,1452.76 cw(c4779.53,1452.76) 4779.53,1492.13 4858.27,1492.13 ccw(c4858.27,1511.81) 4877.95,1511.81 4877.95,1531.5 cw(c4937.01,1531.5) 4937.01,1590.55 ; 4724.41,460.63 cw(c4720.47,441.34) 4740.16,441.34 4740.16,389.76 ccw(c4779.53,389.76) 4779.53,350.39 4858.27,350.39 cw(c4858.27,330.71) 4877.95,330.71 4877.95,295.28 ccw(c4937.01,295.28) 4937.01,236.22 5924.09,236.22 5924.09,271.65 6071.85,271.65 ccw(c6017.72,295.28) 6076.78,295.28 6076.78,362.2 cw(c6096.46,362.2) 6096.46,381.89 6150.44,381.89 ccw(c5851.25,480.32) 6166.21,480.32 6166.21,1118.11 6116.15,1118.11 cw(c6116.15,1137.8) 6096.46,1137.8 6096.46,1531.5 ccw(c6037.41,1531.5) 6091.53,1555.12 5924.09,1555.12 5924.09,1590.55 ; 6126.85,4535.47 55.12,4535.47 ccw(c55.12,4496.1) 15.75,4496.1 15.75,4299.24 6166.22,4299.25 6166.22,4496.1 ccw(c6126.85,4496.12) 6126.85,4535.49 ; 212.6,1590.57 ccw(c212.6,1531.52) 153.54,1531.52 153.54,1511.83 cw(c133.86,1511.83) 133.86,1492.15 55.12,1492.15 ccw(c55.12,1452.78) 15.75,1452.78 15.75,1267.34 cw(c-3.94,1267.34) 0,1248.05 0,1011.83 7.87,1011.83 cw(c7.87,992.15) 27.56,992.15 27.56,858.29 ccw(c66.93,858.29) 66.93,818.92 137.8,818.92 cw(c137.8,799.23) 157.48,799.23 157.48,791.36 cw(c137.8,791.36) 137.8,771.67 66.93,771.67 ccw(c66.93,732.3) 27.56,732.3 27.56,677.18 cw(c7.87,677.18) 7.87,657.5 0,657.5 0,460.65 cw(c-3.94,441.36) 15.75,441.36 15.75,389.78 ccw(c55.12,389.78) 55.12,350.41 133.86,350.41 cw(c133.86,330.73) 153.54,330.73 153.54,295.29 ccw(c212.6,295.29) 212.6,236.24 1199.68,236.24 1199.68,271.67 1347.44,271.67 ccw(c1293.31,295.29) 1352.37,295.29 1352.37,362.22 cw(c1372.05,362.22) 1372.05,381.91 1426.03,381.91 ccw(c1126.84,480.33) 1441.8,480.33 1441.8,1118.13 1391.74,1118.13 cw(c1391.74,1137.81) 1372.05,1137.81 1372.05,1531.52 ccw(c1313,1531.52) 1367.12,1555.14 1199.68,1555.14 1199.68,1590.57 ; 212.6,1590.57 cw(c212.6,1649.63) 153.54,1649.63 153.54,1685.06 ccw(c133.86,1685.06) 133.86,1704.74 55.12,1704.74 cw(c55.12,1744.11) 15.75,1744.11 15.75,1795.69 ccw(c-3.94,1795.69) 0,1814.98 0,2011.83 7.87,2011.83 ccw(c7.87,2031.52) 27.56,2031.52 27.56,2086.63 cw(c66.93,2086.63) 66.93,2126 137.8,2126 ccw(c137.8,2145.69) 157.48,2145.69 157.48,2153.56 ccw(c137.8,2153.56) 137.8,2173.25 66.93,2173.25 cw(c66.93,2212.62) 27.56,2212.62 27.56,2346.48 ccw(c7.87,2346.48) 7.87,2366.16 0,2366.16 0,2602.38 ccw(c-3.94,2621.67) 15.75,2621.67 15.75,2807.11 cw(c55.12,2807.11) 55.12,2846.48 133.86,2846.48 ccw(c133.86,2866.16) 153.54,2866.16 153.54,2885.85 cw(c212.6,2885.85) 212.6,2944.9 ; 212.6,1590.57 1199.68,1590.57 ; 212.6,1590.57 1199.68,1590.57 ; 212.6,2944.9 cw(c212.6,3003.96) 153.54,3003.96 153.54,3039.39 ccw(c133.86,3039.39) 133.86,3059.08 55.12,3059.08 cw(c55.12,3098.45) 15.75,3098.45 15.75,3150.02 ccw(c-3.94,3150.02) 0,3169.31 0,3366.16 7.87,3366.16 ccw(c7.87,3385.85) 27.56,3385.85 27.56,3440.97 cw(c66.93,3440.97) 66.93,3480.34 137.8,3480.34 ccw(c137.8,3500.02) 157.48,3500.02 157.48,3507.89 ccw(c137.8,3507.89) 137.8,3527.58 66.93,3527.58 cw(c66.93,3566.95) 27.56,3566.95 27.56,3700.81 ccw(c7.87,3700.81) 7.87,3720.49 0,3720.49 0,3956.71 ccw(c-3.94,3976) 15.75,3976 15.75,4161.44 cw(c55.12,4161.44) 55.12,4200.81 133.86,4200.81 ccw(c133.86,4220.49) 153.54,4220.49 153.54,4240.18 cw(c212.6,4240.18) 212.6,4299.23 1199.68,4299.23 1199.68,4263.8 1367.12,4263.8 cw(c1313,4240.18) 1372.05,4240.18 1372.05,3846.48 ccw(c1391.74,3846.48) 1391.74,3826.79 1441.8,3826.79 1441.8,3189 cw(c1126.84,3189) 1426.03,3090.57 1372.05,3090.57 ccw(c1372.05,3070.89) 1352.37,3070.89 1352.37,3003.96 cw(c1293.31,3003.96) 1347.44,2980.34 1199.68,2980.34 1199.68,2944.9 ; 212.6,2944.9 1199.68,2944.9 ; 212.6,2944.9 1199.68,2944.9 ; 1199.68,1590.57 1199.68,1626 1347.44,1626 ccw(c1293.31,1649.63) 1352.37,1649.63 1352.37,1716.56 cw(c1372.05,1716.56) 1372.05,1736.24 1426.03,1736.24 ccw(c1126.84,1834.67) 1441.8,1834.67 1441.8,2472.46 1391.74,2472.46 cw(c1391.74,2492.15) 1372.05,2492.15 1372.05,2885.85 ccw(c1313,2885.85) 1367.12,2909.47 1199.68,2909.47 1199.68,2944.9 ; 1787.4,1590.55 ccw(c1787.4,1531.5) 1728.35,1531.5 1728.35,1511.81 cw(c1708.66,1511.81) 1708.66,1492.13 1629.92,1492.13 ccw(c1629.92,1452.76) 1590.55,1452.76 1590.55,1267.32 cw(c1570.87,1267.32) 1574.8,1248.03 1574.8,1011.81 1582.68,1011.81 cw(c1582.68,992.13) 1602.36,992.13 1602.36,858.27 ccw(c1641.73,858.27) 1641.73,818.9 1712.6,818.9 cw(c1712.6,799.21) 1732.28,799.21 1732.28,791.34 cw(c1712.6,791.34) 1712.6,771.65 1641.73,771.65 ccw(c1641.73,732.28) 1602.36,732.28 1602.36,677.17 cw(c1582.68,677.17) 1582.68,657.48 1574.8,657.48 1574.8,460.63 cw(c1570.87,441.34) 1590.55,441.34 1590.55,389.76 ccw(c1629.92,389.76) 1629.92,350.39 1708.66,350.39 cw(c1708.66,330.71) 1728.35,330.71 1728.35,295.28 ccw(c1787.4,295.28) 1787.4,236.22 2774.48,236.22 2774.48,271.65 2922.24,271.65 ccw(c2868.12,295.28) 2927.17,295.28 2927.17,362.2 cw(c2946.86,362.2) 2946.86,381.89 3000.83,381.89 ccw(c2701.64,480.31) 3016.6,480.31 3016.6,1118.11 2966.54,1118.11 cw(c2966.54,1137.8) 2946.86,1137.8 2946.86,1531.5 ccw(c2887.8,1531.5) 2941.93,1555.12 2774.48,1555.12 2774.48,1590.55 ; 1787.4,1590.55 cw(c1787.4,1649.61) 1728.35,1649.61 1728.35,1685.04 ccw(c1708.66,1685.04) 1708.66,1704.73 1629.92,1704.73 cw(c1629.92,1744.1) 1590.55,1744.1 1590.55,1795.67 ccw(c1570.87,1795.67) 1574.8,1814.96 1574.8,2011.81 1582.68,2011.81 ccw(c1582.68,2031.5) 1602.36,2031.5 1602.36,2086.62 cw(c1641.73,2086.62) 1641.73,2125.99 1712.6,2125.99 ccw(c1712.6,2145.67) 1732.28,2145.67 1732.28,2153.54 ccw(c1712.6,2153.54) 1712.6,2173.23 1641.73,2173.23 cw(c1641.73,2212.6) 1602.36,2212.6 1602.36,2346.46 ccw(c1582.68,2346.46) 1582.68,2366.14 1574.8,2366.14 1574.8,2602.36 ccw(c1570.87,2621.65) 1590.55,2621.65 1590.55,2807.09 cw(c1629.92,2807.09) 1629.92,2846.46 1708.66,2846.46 ccw(c1708.66,2866.14) 1728.35,2866.14 1728.35,2885.83 cw(c1787.4,2885.83) 1787.4,2944.88 ; 1787.4,1590.55 2774.48,1590.55 ; 1787.4,1590.55 2774.48,1590.55 ; 1787.4,2944.88 cw(c1787.4,3003.94) 1728.35,3003.94 1728.35,3039.37 ccw(c1708.66,3039.37) 1708.66,3059.06 1629.92,3059.06 cw(c1629.92,3098.43) 1590.55,3098.43 1590.55,3150.01 ccw(c1570.87,3150.01) 1574.8,3169.29 1574.8,3366.14 1582.68,3366.14 ccw(c1582.68,3385.83) 1602.36,3385.83 1602.36,3440.95 cw(c1641.73,3440.95) 1641.73,3480.32 1712.6,3480.32 ccw(c1712.6,3500) 1732.28,3500 1732.28,3507.88 ccw(c1712.6,3507.88) 1712.6,3527.56 1641.73,3527.56 cw(c1641.73,3566.93) 1602.36,3566.93 1602.36,3700.79 ccw(c1582.68,3700.79) 1582.68,3720.47 1574.8,3720.47 1574.8,3956.69 ccw(c1570.87,3975.98) 1590.55,3975.98 1590.55,4161.42 cw(c1629.92,4161.42) 1629.92,4200.79 1708.66,4200.79 ccw(c1708.66,4220.47) 1728.35,4220.47 1728.35,4240.16 cw(c1787.4,4240.16) 1787.4,4299.21 2774.48,4299.21 2774.48,4263.78 2941.93,4263.78 cw(c2887.8,4240.16) 2946.86,4240.16 2946.86,3846.46 ccw(c2966.54,3846.46) 2966.54,3826.77 3016.6,3826.77 3016.6,3188.98 cw(c2701.64,3188.98) 3000.83,3090.55 2946.86,3090.55 ccw(c2946.86,3070.87) 2927.17,3070.87 2927.17,3003.94 cw(c2868.12,3003.94) 2922.24,2980.32 2774.48,2980.32 2774.48,2944.88 ; 1787.4,2944.88 2774.48,2944.88 ; 1787.4,2944.88 2774.48,2944.88 ; 2774.48,1590.55 2774.48,1625.98 2922.24,1625.98 ccw(c2868.12,1649.61) 2927.17,1649.61 2927.17,1716.54 cw(c2946.86,1716.54) 2946.86,1736.22 3000.83,1736.22 ccw(c2701.64,1834.65) 3016.6,1834.65 3016.6,2472.44 2966.54,2472.44 cw(c2966.54,2492.13) 2946.86,2492.13 2946.86,2885.83 ccw(c2887.8,2885.83) 2941.93,2909.45 2774.48,2909.45 2774.48,2944.88 ; 3362.2,1590.55 cw(c3362.2,1649.61) 3303.15,1649.61 3303.15,1685.04 ccw(c3283.46,1685.04) 3283.46,1704.73 3204.72,1704.73 cw(c3204.72,1744.1) 3165.35,1744.1 3165.35,1795.67 ccw(c3145.67,1795.67) 3149.61,1814.96 3149.61,2011.81 3157.48,2011.81 ccw(c3157.48,2031.5) 3177.17,2031.5 3177.17,2086.62 cw(c3216.54,2086.62) 3216.54,2125.99 3287.4,2125.99 ccw(c3287.4,2145.67) 3307.09,2145.67 3307.09,2153.54 ccw(c3287.4,2153.54) 3287.4,2173.23 3216.54,2173.23 cw(c3216.54,2212.6) 3177.17,2212.6 3177.17,2346.46 ccw(c3157.48,2346.46) 3157.48,2366.14 3149.61,2366.14 3149.61,2602.36 ccw(c3145.67,2621.65) 3165.35,2621.65 3165.35,2807.09 cw(c3204.72,2807.09) 3204.72,2846.46 3283.46,2846.46 ccw(c3283.46,2866.14) 3303.15,2866.14 3303.15,2885.83 cw(c3362.2,2885.83) 3362.2,2944.88 ; 3362.2,1590.55 4349.28,1590.55 ; 3362.2,1590.55 4349.28,1590.55 ; 3362.2,2944.88 cw(c3362.2,3003.94) 3303.15,3003.94 3303.15,3039.37 ccw(c3283.46,3039.37) 3283.46,3059.06 3204.72,3059.06 cw(c3204.72,3098.43) 3165.35,3098.43 3165.35,3150.01 ccw(c3145.67,3150.01) 3149.61,3169.29 3149.61,3366.14 3157.48,3366.14 ccw(c3157.48,3385.83) 3177.17,3385.83 3177.17,3440.95 cw(c3216.54,3440.95) 3216.54,3480.32 3287.4,3480.32 ccw(c3287.4,3500) 3307.09,3500 3307.09,3507.88 ccw(c3287.4,3507.88) 3287.4,3527.56 3216.54,3527.56 cw(c3216.54,3566.93) 3177.17,3566.93 3177.17,3700.79 ccw(c3157.48,3700.79) 3157.48,3720.47 3149.61,3720.47 3149.61,3956.69 ccw(c3145.67,3975.98) 3165.35,3975.98 3165.35,4161.42 cw(c3204.72,4161.42) 3204.72,4200.79 3283.46,4200.79 ccw(c3283.46,4220.47) 3303.15,4220.47 3303.15,4240.16 cw(c3362.2,4240.16) 3362.2,4299.21 4349.28,4299.21 4349.28,4263.78 4516.73,4263.78 cw(c4462.61,4240.16) 4521.66,4240.16 4521.66,3846.46 ccw(c4541.35,3846.46) 4541.35,3826.77 4591.41,3826.77 4591.41,3188.98 cw(c4276.45,3188.98) 4575.63,3090.55 4521.66,3090.55 ccw(c4521.66,3070.87) 4501.98,3070.87 4501.98,3003.94 cw(c4442.92,3003.94) 4497.05,2980.32 4349.28,2980.32 4349.28,2944.88 ; 3362.2,2944.88 4349.28,2944.88 ; 3362.2,2944.88 4349.28,2944.88 ; 4349.28,1590.55 4349.28,1625.99 4497.05,1625.99 ccw(c4442.92,1649.61) 4501.98,1649.61 4501.98,1716.54 cw(c4521.66,1716.54) 4521.66,1736.22 4575.63,1736.22 ccw(c4276.45,1834.65) 4591.41,1834.65 4591.41,2472.44 4541.35,2472.44 cw(c4541.35,2492.13) 4521.66,2492.13 4521.66,2885.83 ccw(c4462.61,2885.83) 4516.73,2909.45 4349.28,2909.45 4349.28,2944.88 ; 4937.01,1590.55 cw(c4937.01,1649.61) 4877.95,1649.61 4877.95,1685.04 ccw(c4858.27,1685.04) 4858.27,1704.73 4779.53,1704.73 cw(c4779.53,1744.1) 4740.16,1744.1 4740.16,1795.67 ccw(c4720.47,1795.67) 4724.41,1814.96 4724.41,2011.81 4732.28,2011.81 ccw(c4732.28,2031.5) 4751.97,2031.5 4751.97,2086.62 cw(c4791.34,2086.62) 4791.34,2125.99 4862.2,2125.99 ccw(c4862.2,2145.67) 4881.89,2145.67 4881.89,2153.54 ccw(c4862.2,2153.54) 4862.2,2173.23 4791.34,2173.23 cw(c4791.34,2212.6) 4751.97,2212.6 4751.97,2346.46 ccw(c4732.28,2346.46) 4732.28,2366.14 4724.41,2366.14 4724.41,2602.36 ccw(c4720.47,2621.65) 4740.16,2621.65 4740.16,2807.09 cw(c4779.53,2807.09) 4779.53,2846.46 4858.27,2846.46 ccw(c4858.27,2866.14) 4877.95,2866.14 4877.95,2885.83 cw(c4937.01,2885.83) 4937.01,2944.88 ; 4937.01,1590.55 5924.09,1590.55 ; 4937.01,1590.55 5924.09,1590.55 ; 4937.01,2944.88 cw(c4937.01,3003.94) 4877.95,3003.94 4877.95,3039.37 ccw(c4858.27,3039.37) 4858.27,3059.06 4779.53,3059.06 cw(c4779.53,3098.43) 4740.16,3098.43 4740.16,3150.01 ccw(c4720.47,3150.01) 4724.41,3169.29 4724.41,3366.14 4732.28,3366.14 ccw(c4732.28,3385.83) 4751.97,3385.83 4751.97,3440.95 cw(c4791.34,3440.95) 4791.34,3480.32 4862.2,3480.32 ccw(c4862.2,3500) 4881.89,3500 4881.89,3507.88 ccw(c4862.2,3507.88) 4862.2,3527.56 4791.34,3527.56 cw(c4791.34,3566.93) 4751.97,3566.93 4751.97,3700.79 ccw(c4732.28,3700.79) 4732.28,3720.47 4724.41,3720.47 4724.41,3956.69 ccw(c4720.47,3975.98) 4740.16,3975.98 4740.16,4161.42 cw(c4779.53,4161.42) 4779.53,4200.79 4858.27,4200.79 ccw(c4858.27,4220.47) 4877.95,4220.47 4877.95,4240.16 cw(c4937.01,4240.16) 4937.01,4299.21 5924.09,4299.21 5924.09,4263.78 6091.53,4263.78 cw(c6037.41,4240.16) 6096.46,4240.16 6096.46,3846.46 ccw(c6116.15,3846.46) 6116.15,3826.77 6166.21,3826.77 6166.21,3188.98 cw(c5851.25,3188.98) 6150.44,3090.55 6096.46,3090.55 ccw(c6096.46,3070.87) 6076.78,3070.87 6076.78,3003.94 cw(c6017.72,3003.94) 6071.85,2980.32 5924.09,2980.32 5924.09,2944.88 ; 4937.01,2944.88 5924.09,2944.88 ; 4937.01,2944.88 5924.09,2944.88 ; 5924.09,1590.55 5924.09,1625.99 6071.85,1625.99 ccw(c6017.72,1649.61) 6076.78,1649.61 6076.78,1716.54 cw(c6096.46,1716.54) 6096.46,1736.22 6150.44,1736.22 ccw(c5851.25,1834.65) 6166.21,1834.65 6166.21,2472.44 6116.15,2472.44 cw(c6116.15,2492.13) 6096.46,2492.13 6096.46,2885.83 ccw(c6037.41,2885.83) 6091.53,2909.45 5924.09,2909.45 5924.09,2944.88

## Other copper
Top Layer:
  pour cut-out: 185.94,1104.49 185.94,720.63 304.06,720.63 304.06,1104.49
  pour cut-out: 500,1389 500,1525 622,1525 622,1433
  pour cut-out: 671.69,1553.68 671.69,1514.32 738.62,1514.32 738.62,1553.68
  pour cut-out: 914.69,1487.31 875.31,1487.31 875.31,1420.38 914.69,1420.38
  pour cut-out: 294.68,1317.31 255.32,1317.31 255.32,1250.38 294.68,1250.38
  pour cut-out: 294.68,1417.31 255.32,1417.31 255.32,1350.38 294.68,1350.38
  pour cut-out: 299.72,1206.25 390.27,1206.25 390.27,1363.73 299.72,1363.73
  pour cut-out: 742.01,1371.26 867.99,1371.26 867.99,1528.74 742.01,1528.74
  pour cut-out: 456.3,1343.7 456.3,1056.3 743.7,1056.3 743.7,1343.7
  pour cut-out: 787.17,452.99 787.17,327.01 932.83,327.01 932.83,452.99
  pour cut-out: 308.35,421.65 308.35,378.35 351.65,378.35 351.65,421.65
L2:
  pour cut-out: 308.35,421.65 308.35,378.35 351.65,378.35 351.65,421.65
  pour cut-out: 787.17,452.99 787.17,327.01 932.83,327.01 932.83,452.99
  pour cut-out: 1137.28,1557.13 1137.28,1320.91 1373.5,1320.91 1373.5,1557.13
L3:
  pour cut-out: 308.35,421.65 308.35,378.35 351.65,378.35 351.65,421.65
  pour cut-out: 787.17,452.99 787.17,327.01 932.83,327.01 932.83,452.99
  pour cut-out: 1137.28,1557.13 1137.28,1320.91 1373.5,1320.91 1373.5,1557.13
Bottom Layer:
  pour cut-out: 787.17,452.99 787.17,327.01 932.83,327.01 932.83,452.99
  pour cut-out: 308.35,421.65 308.35,378.35 351.65,378.35 351.65,421.65

## Silkscreen, mask and mechanical layers (free items; w line width, h text height)
Top Overlay:
  text "B45100557C" at 2066.76,4421.94 h80
  text "5.1.9.003022" at 2066.76,4360.92 h80
  text "3V" at 107,1048 h40
  text "GND" at 71,949 h40
  text "CLK" at 80,850 h40
  text "DIO" at 92,733 h40
  text "B45100557C" at 3596.02,128.02 h80
  text "TOP" at 752,86 h100
  text "5.1.9.003022" at 3596.02,66.99 h80
Bottom Overlay:
  lines w5: 303.15,303.17 303.15,287.42 263.78,287.42 263.78,303.17 ; 362.21,303.17 362.21,287.42 401.58,287.42 401.58,303.17 ; 224.41,314.98 ccw(c236.22,314.98) 236.22,303.17 263.78,303.17 ; 224.41,314.98 224.41,1570.89 ; 224.41,314.98 263.78,314.98 ; 224.41,1570.89 cw(c236.22,1570.89) 236.22,1582.7 263.78,1582.7 ; 224.41,1570.89 263.78,1570.89 ; 263.78,303.17 992.13,303.17 ; 263.78,303.17 263.78,314.98 ; 263.78,314.98 992.13,314.98 ; 263.78,314.98 263.78,1570.89 ; 263.78,1570.89 992.13,1570.89 ; 263.78,1570.89 263.78,1582.7 ; 263.78,1582.7 992.13,1582.7 ; 263.78,1582.7 992.13,1582.7 ; 992.13,303.17 992.13,314.98 ; 992.13,303.17 1019.69,303.17 ccw(c1019.69,314.98) 1031.5,314.98 ; 992.13,314.98 992.13,1570.89 ; 992.13,314.98 1031.5,314.98 ; 992.13,1570.89 992.13,1582.7 ; 992.13,1570.89 1031.5,1570.89 ; 992.13,1582.7 1019.69,1582.7 cw(c1019.69,1570.89) 1031.5,1570.89 ; 1031.5,314.98 1031.5,1570.89
  text "BATTERY" at 949,1100 h160
  text "5.1.9.003022" at 1047.99,684.02 h80 r270
  text "B45100557C" at 1109.02,684.02 h80 r270
  text "BOT" at 1144,86 h100
Top Solder:
  rectangle: 1060,1415 1122,1475
  rectangle: 1166,1123 1228,1183
  rectangle: 1297,1124 1359,1184
  rectangle: 1368,616 1430,676
  rectangle: 37,367 99,427
  rectangle: 193,1506 255,1566
  rectangle: 35,1272 97,1332
  rectangle: 49,928 111,988
  rectangle: 54,840 116,900
  rectangle: 49,696 111,756
Bottom Solder:
  rectangle: 1366.02,639.98 1427.98,699.98
  rectangle: 1167.02,1122.98 1228.98,1182.98
  rectangle: 1296.02,1126.98 1357.98,1186.98
  rectangle: 1060.02,1411.98 1121.98,1471.98
  rectangle: 190.02,1505.98 251.98,1565.98
  rectangle: 34.02,1272.98 95.98,1332.98
  rectangle: 51.02,930.98 112.98,990.98
  rectangle: 50.02,842.98 111.98,902.98
  rectangle: 51.02,693.98 112.98,753.98
Mechanical 1:
  circle w5: c1107.16,1523.64 r31.5
  circle w5: c426.05,913.41 r31.5
  circle w5: c961.49,283.48 r15.75
  circle w5: c961.49,1543.33 r15.75
  circle w5: c1107.16,1523.64 r43.31
  lines w5: 414.24,236.24 414.24,871.74 cw(c426.05,913.41) 414.24,955.07 414.24,1590.57 ; 437.86,236.24 437.86,871.74 ccw(c426.05,913.41) 437.86,955.07 437.86,1590.57 ; 949.68,236.24 949.68,1590.57 ; 973.3,236.24 973.3,1590.57 ; 0,460.65 cw(c-3.94,441.36) 15.75,441.36 15.75,389.78 ccw(c55.12,389.78) 55.12,350.41 133.86,350.41 cw(c133.86,330.73) 153.54,330.73 153.54,295.3 ccw(c212.6,295.3) 212.6,236.24 1199.68,236.24 1199.68,271.67 1347.44,271.67 ccw(c1293.31,295.3) 1352.37,295.3 1352.37,362.22 cw(c1372.05,362.22) 1372.05,381.91 1426.03,381.91 ccw(c1126.84,480.33) 1441.8,480.33 1441.8,1118.13 1391.74,1118.13 cw(c1391.74,1137.82) 1372.05,1137.82 1372.05,1531.52 ccw(c1313,1531.52) 1367.12,1555.14 1199.68,1555.14 1199.68,1590.57 966.82,1590.57 212.6,1590.57 ccw(c212.6,1531.52) 153.54,1531.52 153.54,1511.83 cw(c133.86,1511.83) 133.86,1492.15 55.12,1492.15 ccw(c55.12,1452.78) 15.75,1452.78 15.75,1267.34 cw(c-3.94,1267.34) 0,1248.05 0,1011.83 7.87,1011.83 cw(c7.87,992.15) 27.56,992.15 27.56,858.29 ccw(c66.93,858.29) 66.93,818.92 137.8,818.92 cw(c137.8,799.23) 157.48,799.23 157.48,791.36 cw(c137.8,791.36) 137.8,771.67 66.93,771.67 ccw(c66.93,732.3) 27.56,732.3 27.56,677.19 cw(c7.87,677.19) 7.87,657.5 0,657.5 0,460.65 ; 1274.48,236.24 1293.31,236.24 ccw(c1293.31,295.3) 1294.16,236.25 1294.16,266.44 1294.16,300.53 1294.16,332.7 1274.48,332.7 1274.48,300.53 1274.48,266.44 1274.48,236.24 ; 1274.48,1494.11 1294.16,1494.11 1294.16,1526.28 1294.16,1560.38 1294.16,1590.57 1274.48,1590.57 1274.48,1560.38 1274.48,1526.28 1274.48,1494.11
Mechanical 2:
  drawing of 601 lines, arcs and shapes, not listed
Drill Drawing:
  text ".Legend" at 6715,3267 h60

## Text inside footprints (layer, text, board x,y; h text height)
?: Top Overlay "11. FINISHED" at 6784.99,235 h60; Top Overlay "10. SQUARE RESISTANCE" at 6784.99,355 h60; Top Overlay "9. SILKSCREEN" at 6784.99,475 h60; Top Overlay "8. SOLDERMASK" at 6784.99,595 h60; Top Overlay "7. TWIST AND ROW" at 6784.99,715 h60; Top Overlay "6. PCB MATIREL" at 6784.99,835 h60; Top Overlay "3. PCB THICKNESS" at 6784.99,1195 h60; Top Overlay "2. LAYERS" at 6784.99,1315 h60; Top Overlay "1. SPEC IPC-2221 AND IPC-2222" at 6785,1425 h60; Top Overlay "NOTE:ONLESS OTHERWISE SPECIFIED" at 6785,1555 h60; Top Overlay "DATE: 2017.09.12" at 8045,1765 h78.74; Top Overlay "Drawn By: mei" at 6785.01,1764.99 h78.74; Top Overlay "MODE :" at 7245,2175 h60; Top Overlay "B45100557C" at 7243.98,1991.02 h100; Top Overlay "DUSUN ELECTRON CO.;LTD" at 7126.36,2406.43 h100; Top Overlay "TITLE :" at 6785.01,2564.99 h60; Top Overlay "4. COPPER THICKNESS" at 6784.99,1075 h60; Top Overlay "5. GOLD THICKNESS" at 6784.99,955 h60; Top Overlay "FR-4" at 7945,845 h60; Top Overlay "0.75%" at 7945,725 h60; Top Overlay "white" at 7945,475 h60; Top Overlay "green" at 7945,605 h60; Top Overlay "Gold" at 7945.01,235 h60; Top Overlay "<35R" at 7945,365 h60; Top Overlay "non" at 7945,965 h60; Top Overlay "35uM" at 7945,1085 h60; Top Overlay "1.0mm" at 7945,1205 h60; Top Overlay "4" at 7945,1315 h60